# Altium PCB linearInjector.PcbDoc
Units mm, origin at the board's own origin, x right, y up, seen from the top; angles counter-clockwise.
Board outline 105.25 x 56.25 mm, 2 copper layers (Top Layer, Bottom Layer); 33 components, 16 nets, 76 pads, 5 vias.
Unrouted connection lines stored in the file: 59.
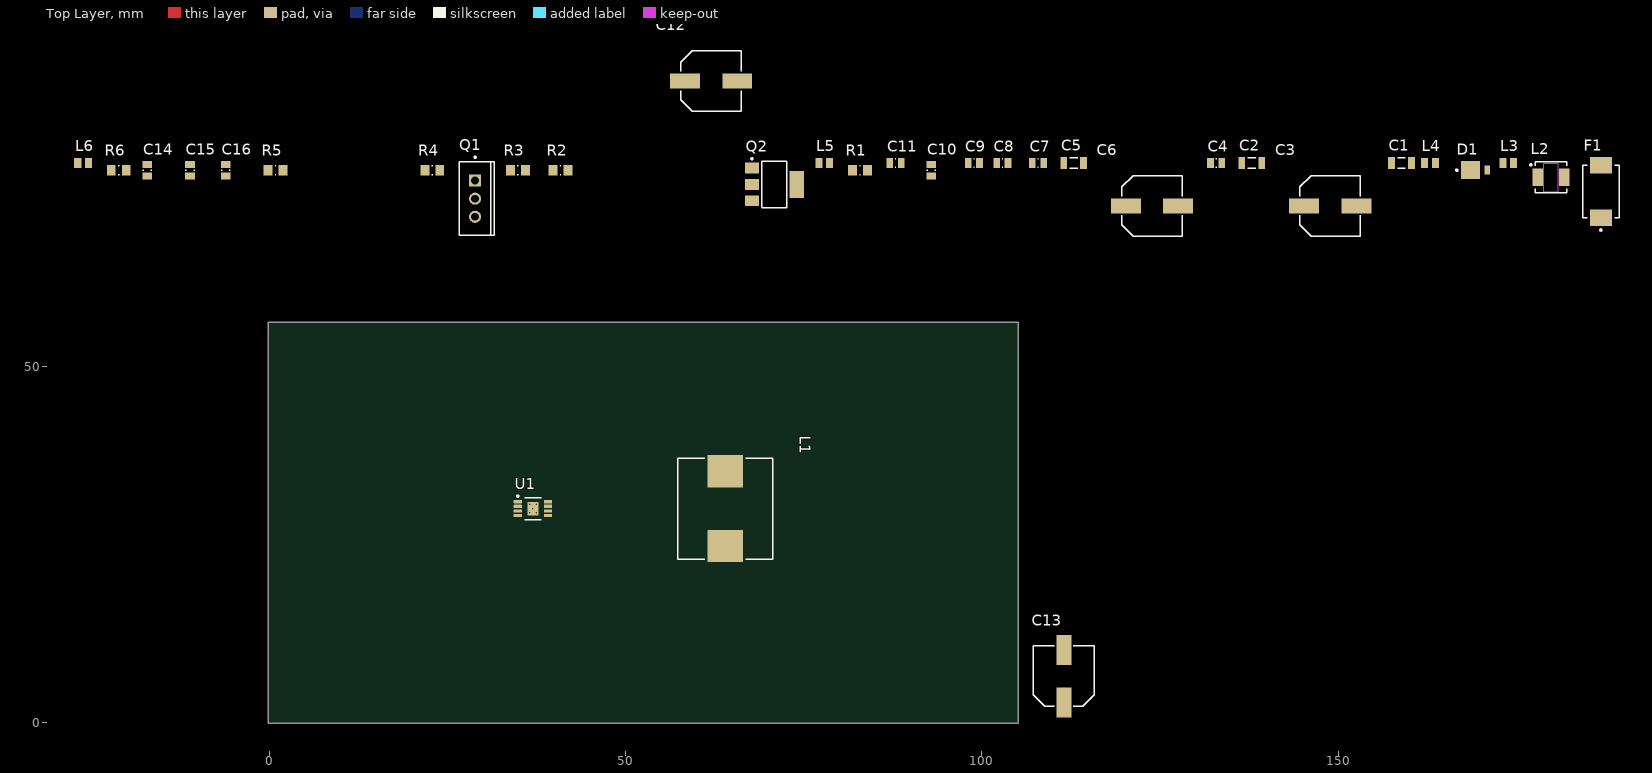
[diagram p0: Top Layer view]
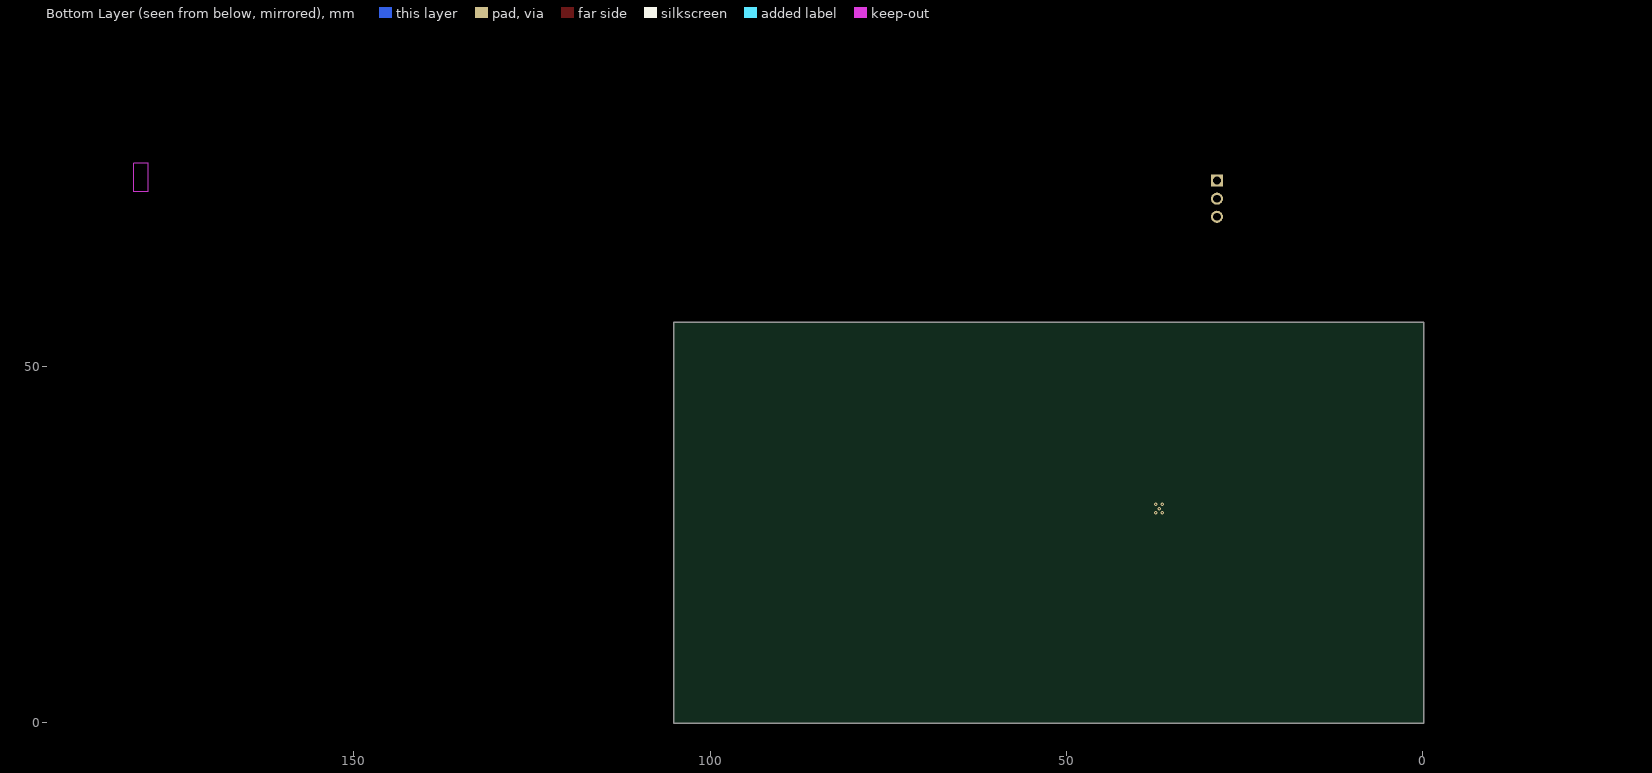
[diagram p1: Bottom Layer view, seen from below]

## Layer stack, top to bottom
Top Solder: solder mask 0.0102, Solder Resist, Dk 3.5
Top Layer: signal copper 0.0356
Dielectric 1: dielectric 0.32, FR-4, Dk 4.8
Bottom Layer: signal copper 0.0356
Bottom Solder: solder mask 0.0102, Solder Resist, Dk 3.5

## Board outline
-0.127,-0.127 105.127,-0.127 105.127,56.127 -0.127,56.127

## Design rules (kind name [scope] priority, off if disabled: settings)
Clearance [All] p1: gap=0.254 ignorepadtopadclearanceinfootprint=FALSE except(0: Arc-Hole Track-Hole SMDPad-Hole THPad-Hole Via-Hole Fill-Hole Poly-Hole Region-Hole Text-Hole)
PolygonConnect [All] p1: connectstyle=Relief reliefconductorwidth=0.254 reliefentries=4 polygonreliefangle="90 Angle" airgapwidth=0.254
RoomDefinition linearInjector_main [InComponentClass('linearInjector_main')] p1: confinementstyle=ConfineIn formatcopy=TRUE lockcomponents=FALSE outline 106.5,2.5 346.5,2.5 346.5,25.5 106.5,25.5
RoutingVias [All] p1: holewidth=0.711 width=1.27 viastyle="Through Hole" minholewidth=0.711 minwidth=1.27 maxholewidth=0.711 maxwidth=1.27
SolderMaskExpansion [All] p1: expansion=0.102
Width [All] p1: maxlimit=0.254 minlimit=0.254 preferedwidth=0.254
30 further rules are at their usual default settings.

## Components (designator, comment, footprint, x,y, rotation, side; value= is the part's Value field where it differs from the comment)
C1 "10uF" CAPC1206(3216)130_L 158.884,78.5 r0 top
C2 "10uF" CAPC1206(3216)130_L 137.884,78.5 r0 top
C3 "EEE-FK1E221P" PNSC-EEE-FK1E221P_N 148.884,72.5 r0 top
C4 "1uF" CAPC0805(2012)75_L 132.884,78.5 r0 top value=10nF
C5 "10uF" CAPC1206(3216)130_L 112.884,78.5 r0 top
C6 "EEE-FK1E221P" PNSC-EEE-FK1E221P_N 123.884,72.5 r0 top
C7 "100nF" CAPC0805(2012)75_L 107.884,78.5 r0 top value=10nF
C8 "1uF" CAPC0805(2012)75_L 102.884,78.5 r0 top value=10nF
C9 "10nF" CAPC0805(2012)75_L 98.884,78.5 r0 top
C10 "100nF" CAPC0805(2012)75_L 92.884,77.5 r90 top value=10nF
C11 "10nF" CAPC0805(2012)75_L 87.884,78.5 r0 top
C12 "EEE-FK1E221P" PNSC-EEE-FK1E221P_N 62,90 r0 top
C13 "EEE-FK1E221P" PNSC-EEE-FK1E221P_N 111.5,6.5 r90 top
C14 "10nF" CAPC0805(2012)75_L -17.116,77.5 r90 top
C15 "100nF" CAPC0805(2012)75_L -11.116,77.5 r90 top value=10nF
C16 "1uF" CAPC0805(2012)75_L -6.116,77.5 r90 top value=10nF
D1 "MBRM120LT3" ONSC-POWERMITE-2-457-04_D_V 169.884,77.5 r0 top
F1 "0ZCF0110FF2C" TECO-SMD100F-2_V 186.884,74.5 r90 top
L1 "7443550101" WE-HCI-1350 64,30 r270 top
L2 "744373240010" "WE-LHMI 4020" 179.884,76.5 r0 top
L3 "0805" INDC2013X105X50LL20T30 173.884,78.5 r0 top
L4 "0805" INDC2013X105X50LL20T30 162.884,78.5 r0 top
L5 "0805" INDC2013X105X50LL20T30 77.884,78.5 r0 top
L6 "0805" INDC2013X105X50LL20T30 -26.116,78.5 r0 top
Q1 "2SB1259" ONSC-TO-220-3-221A-09 28.884,73.5 r0 top
Q2 "BSP19AT1" ONSC-SOT-223-4-318E-04_V 70.884,75.5 r0 top
R1 "1k" RESC0805(2012)_M 82.884,77.5 r0 top value="1780.00 Ohm"
R2 "1k" RESC0805(2012)_M 40.884,77.5 r0 top value="1780.00 Ohm"
R3 "1k" RESC0805(2012)_M 34.884,77.5 r0 top value="1780.00 Ohm"
R4 "100" RESC0805(2012)_M 22.884,77.5 r0 top value="1780.00 Ohm"
R5 "1k" RESC0805(2012)_M 0.884,77.5 r0 top value="1780.00 Ohm"
R6 "1k" RESC0805(2012)_M -21.116,77.5 r0 top value="1780.00 Ohm"
U1 "THS3120IDGN" DGN0008D_L 37,30 r0 top

## Footprints (in the part's own frame and the unit in brackets; to place one, negate y for a bottom-side part, rotate by r counter-clockwise, add the part's x,y. Pads: shape width x height; smd on the part's side, far side on the other; paste and mask are expansions set on the pad)
CAPC0805(2012)75_L [mm] "Chip Capacitor, Body 2.0x1.2mm, Height 0.75mm, IPC High Density"
  rect 0.95x1.35 smd: 1(-0.8,0) 2(0.8,0)
  silkscreen extent -0.05,-0.58 0.05,0.58, body extent -1.1,-0.72 1.1,0.72, height 0.75
CAPC1206(3216)130_L [mm] "Chip Capacitor, Body 3.2x1.6mm, Height 1.3mm, IPC High Density"
  rect 0.95x1.7 smd: 1(-1.4,0) 2(1.4,0)
  silkscreen extent -0.55,-0.75 0.55,0.75, body extent -1.7,-0.9 1.7,0.9, height 1.3
DGN0008D_L [mm] "TSOP, 8-Leads, Body 3.1x3.1mm, Pitch 0.65mm, Thermal Pad 1.89x1.57mm, IPC High Density"
  rrect22% 1.15x0.45 smd: 1(-2.125,0.975) 2(-2.125,0.325) 3(-2.125,-0.325) 4(-2.125,-0.975) 5(2.125,-0.975) 6(2.125,-0.325) 7(2.125,0.325) 8(2.125,0.975)
  rrect6% 1.57x1.89 smd: 9(0,0)
  silkscreen extent -2.25,-1.55 1.15,1.87, body extent -2.45,-1.5 2.45,1.5, height 0.94
INDC2013X105X50LL20T30 [mm] "Chip Inductor, 2-Leads, Body 2.2x1.45mm, IPC High Density"
  rect 0.99x1.39 smd: 1(-0.755,0) 2(0.755,0)
  body extent -1.1,-0.72 1.1,0.72, height 1.05
ONSC-POWERMITE-2-457-04_D_V [mm] "POWERMITE, 2-Leads, Body 1.965x1.9mm"
  rect 2.67x2.54 smd: 1(-1.335,0)
  rect 0.762x1.27 smd: 2(1.016,0)
  silkscreen extent -3.34,-0.12 -3.09,0.12, body extent -2.04,-0.95 -0.08,0.95, height 1.15
ONSC-SOT-223-4-318E-04_V [mm] "SOT223, 4-Leads, Body 6.5x3.5mm, Pitch 2.3mm"
  rect 2x1.5 smd: 1(-3.15,2.3) 2(-3.15,0) 3(-3.15,-2.3)
  rect 2x3.8 smd: 4(3.15,0)
  silkscreen extent -3.27,-3.25 1.75,3.72, body extent -1.75,-3.25 1.75,3.25, height 1.75
ONSC-TO-220-3-221A-09 [mm] "FM, 3-Leads, Body 10.3x4.85mm, Pitch 2.54mm"
  rect 1.7x1.7 hole 1.1: 1(0,2.54)
  round 1.7 hole 1.1: 2(0,0) 3(0,-2.54)
  silkscreen extent -2.2,-5.15 2.7,5.92, body extent -2.18,-5.15 2.67,5.15, height 19.85
PNSC-EEE-FK1E221P_N [mm] "CAPAE, 2-Leads, Dia 8mm, Body Length 10.5mm, IPC Medium Density"
  rect 4.2x2.1 smd: 1(-3.675,0) 2(3.675,0)
  silkscreen extent -4.25,-4.25 4.25,4.25, body extent -5,-4.25 5,4.25, height 10.5
RESC0805(2012)_M [mm] "Chip Resistor, Body 2.0x1.3mm, IPC Low Density"
  rect 1.25x1.5 smd: 1(-1.05,0) 2(1.05,0)
  silkscreen extent -0.05,-0.65 0.05,0.65, body extent -1.1,-0.67 1.1,0.67, height 0.7
TECO-SMD100F-2_V [mm] "SMD, 2-Leads, Body 7.34x5.12mm"
  rect 2.3x3.1 smd: 1(-3.7,0) 2(3.7,0)
  silkscreen extent -5.52,-2.56 3.68,2.56, body extent -3.67,-2.56 3.67,2.56, height 3
WE-HCI-1350 [mm] "Inductor, 2-Leads, Body 13.0 x 12.8 mm"
  rect 4.5x5 smd: 1(-5.25,0) 2(5.25,0)
  silkscreen extent -7.1,-6.65 7.1,6.65, body extent -7,-6.4 7,6.4, height 4.99
"WE-LHMI 4020" [mm] "SMD Inductor, 2-Leads, Body 4.45 x 4.06mm"
  rect 1.5x2.4 smd: 1(-1.85,0) 2(1.85,0)
  Keep-Out Layer lines w0.127: -1,-2 -1,2 1,2 1,-2 -1,-2
  silkscreen extent -2.97,-2.2 2.2,2.2, body extent -2.22,-2.03 2.23,2.03, height 1.8

## Part data
C1 C2 C5: library part CMP-1037-04970-1, Case-EIA=1206, Case-Metric=3216, Rated Voltage="10 V", Tolerance="-20% to +80%", Max Thickness="1.3 mm", Technology=SMT
C3 C6 C12 C13: library part CMP-1665-00017-1, "CAP ALUM 220UF 20% 25V SMD", Datasheet=http://industrial.panasonic.com/cdbs/www-data/pdf/RDE0000/ABA0000C1181.pdf, PartNumber=EEE-FK1E221P
C4 C7 C8 C9 C10 C11 C14 C15 C16: library part CMP-1036-03812-1, Case-EIA=0805, Case-Metric=2012, Rated Voltage="10 V", Tolerance="-20% to +80%", Max Thickness="0.75 mm", Technology=SMT
D1: library part CMP-1055-00282-1, "Schottky Power Rectifier, 2-Pin Powermite, Tape and Reel", Manufacturer="On Semiconductor", ComponentLink1Description="Manufacturer URL", ComponentLink1URL=http://www.onsemi.com/, ComponentLink2Description=Datasheet, ComponentLink2URL=http://www.onsemi.cn/pub_link/Collateral/MBRM120L-D.PDF, ComponentLink3Description="Package Specification", ComponentLink3URL=http://www.onsemi.com/pub_link/Collateral/457-04.PDF, Configuration=Single, DatasheetVersion="Rev. 7", IFSM Max (A)=50, Mounting Technology="Surface Mount", Note1=0, PackageDescription="2-Pin POWERMITE, Body 1.965 x 1.9 mm", PackageReference=POWERMITE-2-457-04, PackageVersion="Rev. F, 05/2013", Packing="Tape and Reel", PartNumber=MBRM120LT3, RoHS=FALSE
F1: library part CMP-2000-05420-1, "ptc", Hold Current=1.1A, Manufacturer=TEConnectivity/CircuitProtection, Maximum Current Rating=40A, Maximum Initial Resistance=N/A, Maximum Post Trip Resistance=0.48Ohm, Maximum Voltage Rating=30V, Minimum Initial Resistance=0.12Ohm, Operating Temperature=85(Max)C, Package/Case=2920, Package Description="2-Pin Surface Mount Device, Body 7.34 x 5.12 mm", Package Reference=SMD100F-2, Trip Current=2.2A, Typical Power Dissipation=1.7(Max)W, Agency Approvals=CSA/TUV/UL, Applications=N/A, Datasheet URL=http://datasheet.octopart.com/SMD100F-2-Tyco-Electronics-datasheet-11085073.pdf, Datasheet Version=May-11, Dimension=N/A, Family=SMD, Lead Diameter=N/R, Manufacturer URL=http://www.te.com/, Maximum Trip Time=N/A, Mounting=SurfaceMount, Number of Terminals=2, Packaging=TapeandReel, Part No=SMD100F-2, RoHS=Yes, Seated Plane Height=N/R, Terminal Pitch=N/A, Wire Form=N/R
L1: library part CMP-0226-00031-1, "SMD Flat Wire High Current Inductor WE-HCI, L=10.0 µH", Inductance="10.0 µH", ComponentLink1Description="Manufacturer Link", ComponentLink1URL=http://www.we-online.com, ComponentLink2Description=Datasheet, ComponentLink2URL=http://www.we-online.de/katalog/media/pdf/7443550101.pdf, DatasheetVersion="ver 1, Aug-2009", PackageDescription="Inductor, 2-Leads, Body 13.0 x 12.8 mm", PackageReference=WE-HCI-1350, PackageVersion=2008
L2: library part CMP-1353-00038-1, "SMD Power Inductor WE-LHMI, L=0.10 µH", Inductance="0.10 µH", Manufacturer="Wuerth Elektronik", ComponentLink1Description="Manufacturer URL", ComponentLink1URL=http://www.we-online.com, ComponentLink2Description=Datasheet, ComponentLink2URL=http://katalog.we-online.de/kataloge/eisos/media/pdf/744373240010.pdf, PackageReference="WE-LHMI 4020", PartNumber=744373240010
L3 L4 L5 L6: library part CMP-1660-00003-1, Case Code (Metric)=2012, Current Rating="6 A", Max Operating Temperature="125 degC", Min Operating Temperature="-40 degC", Package Quantity=1, Resistance="4 mohm", Tolerance=30%, Case\Package=0805, Case Code (Imperial)=0805, ComponentLink1Description="Manufacturer URL", ComponentLink1URL=http://www.t-yuden.com/, ComponentLink2Description=Datasheet, ComponentLink2URL=http://ds.yuden.co.jp/TYCOMPAS/ut/detail.do?productNo=FBMJ2125HM210NT&fileName=FBMJ2125HM210NT_SS&mode=specSheetDownload, Core Material=Ferrite, DatasheetVersion=08/2016, Height="0.85 mm", Impedance="21 Ohm", Length="2 mm", Max Current Rating="6 A", Mount="Surface Mount", Mounting Technology="Surface Mount", PackageDescription="2-Pin Surface Mount Device, Body 2 x 1.25 mm", PackageReference=0805, Packaging="Tape and Reel", REACH SVHC=Unknown, RoHSCompliant=true, Width="1.25 mm"
Q1: library part CMP-1031-00034-1, Manufacturer="On Semiconductor", PartNumber=MJE5740G, ComponentLink1Description="Manufacturer URL", ComponentLink1URL=http://www.onsemi.com/, ComponentLink2Description=Datasheet, ComponentLink2URL=http://www.onsemi.com/pub_link/Collateral/MJE5740-D.PDF, ComponentLink3Description="Package Specification", ComponentLink3URL=http://www.onsemi.com/pub_link/Collateral/221A-09.PDF, DatasheetVersion="Rev. 11", IC Continuous (A)=8, Mounting Technology="Through Hole", PackageDescription="3-Pin Flange Mount, Vertical Straight Lead, Body 9.97 x 4.445 mm, Pitch 2.54 mm", PackageReference=TO-220-3-221A-09, PackageVersion="Rev. AG, 09/2011", Packing=Tube, Polarity=NPN, RoHS=TRUE
Q2: library part CMP-1048-00457-1, "NPN Silicon Expitaxial Transistor, 4-Pin SOT-223, Tape and Reel", Manufacturer="On Semiconductor", ComponentLink1Description="Manufacturer URL", ComponentLink1URL=http://www.onsemi.com/, ComponentLink2Description=Datasheet, ComponentLink2URL=http://www.onsemi.com/pub_link/Collateral/BSP19AT1-D.PDF, ComponentLink3Description="Package Specification", ComponentLink3URL=http://www.onsemi.com/pub_link/Collateral/318E-04.PDF, DatasheetVersion="Rev. 11", fT Min (MHz)=70, IC Continuous (A)=0.1, Mounting Technology="Surface Mount", PackageDescription="4-Pin Small Outline Transistor, Body 6.5 x 3.5 mm, Pitch 2.3 mm", PackageReference=SOT-223-4-318E-04, PackageVersion="Rev. N, 08/2009", Packing="Tape and Reel", PartNumber=BSP19AT1, Polarity=NPN, RoHS=FALSE
R1 R2 R3 R5 R6: library part CMP-1013-00536-1, "1k 1%", Case-EIA=0805, Case-Metric=2012, Power="0.125 W", Tolerance="1 %", Technology=SMT
R4: library part CMP-1013-00536-1, Case-EIA=0805, Case-Metric=2012, Power="0.125 W", Tolerance="1 %", Technology=SMT
U1: library part CMP-0018-00648-2, "Single, Low Noise, High Output Drive, 475 mA Current-Feedback Amplifier with Power-Down, 10 to 30 V, -40 to 85 degC, 8-pin SOP (DGN8), Green (RoHS & no Sb/Br)", Manufacturer="Texas Instruments", 2nd Harmonic(dBc)=51, 3rd Harmonic(dBc)=50, @ MHz=10, Acl, min stable gain(V/V)=1, BW @ Acl(MHz)=130, Code_JEDEC=MO-187, ComponentLink1Description="Manufacturer URL", ComponentLink1URL=http://www.ti.com/, ComponentLink2Description=Datasheet, ComponentLink2URL=http://www.ti.com/general/docs/lit/getliterature.tsp?genericPartNumber=THS3120&fileType=pdf, ComponentLink3Description="Package Specification", ComponentLink3URL=http://www.ti.com/litv/pdf/mpds046e, DatasheetVersion=SLOS420E, Diff Gain(%)=0.007, Diff Phase(deg)=0.018, Eco-Plan="Green (RoHS & no Sb/Br)", Iib(Max)(nA)=20000, Io(Typ)(mA)=475, Iq per channel(Max)(mA)=11, Mounting Technology="Surface Mount", Number of Channels=1, PackageDescription="8-pin Plastic Small Outline, Body 3 x 3 mm, Pitch 0.65 mm", PackageReference=DGN0008D, PackageVersion="4073271/F, 05/2011", PartNumber=THS3120IDGN, Settling Time (0.1%)(Typ)(ns)=11, Slew Rate(Typ)(V/us)=1700, Sub Family="High Output Current Amplifier (>=50mA), High Speed Amplifier (>=50MHz), High Supply Voltage Amplifier (>=30V)", THD (Fc is 1 MHz)(Typ)(dB)=-78, Vio(Max)(mV)=8, Vn at Flatband(Typ)(nV/rtHz)=2.5, Vs(Max)(V)=30, Vs(Min)(V)=10

## Via types
v1: diameter 0.5, hole 0.2, Top Layer to Bottom Layer, 5 vias

## Nets (pads, with @x,y where several pads share a name; then routed paths per layer and width w, separated by ;. In a path a pad name is that pad's centre, name@x,y a point inside that pad or via, vN(x,y) a via of type N, cw(c..) or ccw(c..) an arc to the next point about the centre after c; other vN are vias at no path point)
AC_Input: C12.1 C13.1
GND: C1.2 C2.2 C3.2 C4.1 C5.2 C6.2 C7.1 C8.1 C9.1 C10.1 C11.1 C14.1 C15.1 C16.1 D1.2 R6.1 U1.1 U1.4 U1.8 U1.9
  other v1: 36.55,29.4 37.45,29.4 37,30 36.55,30.6 37.45,30.6
NetC1_1: C1.1 C4.2 C7.2 C9.2 L3.1 U1.7
NetC2_1: C2.1 C3.1 C5.1 C6.1 C8.2 C10.2 C11.2 L4.1 Q1.1 Q1.2 Q2.1 Q2.2 Q2.4 U1.6
NetC12_2: C12.2 C13.2 R2.1
NetC14_2: C14.2 C15.2 C16.2 R3.1 R5.1 R6.2
NetD1_1: D1.1 F1.1 L3.2
NetL1_1: L1.1 L2.2
NetL2_1: L2.1 L4.2
NetL5_1: L5.1 R3.2
NetL6_1: L6.1 R1.2
NetR1_1: R1.1 R2.2 R4.2 U1.2
NetR4_1: R4.1 R5.2 U1.3
Opamp_Supply: F1.2
Power_Input: L1.2
Power_Output: L5.2 L6.2 Q1.3 Q2.3
pads on no net: U1.5

## Silkscreen, mask and mechanical layers (free items; w line width, h text height)
Mechanical 3:
  lines w0.254: 7.496,0 51.496,0 ccw(c51.496,1) 52.496,1 ; 7.5,0 ccw(c0,0) 0,7.5 0,18 cw(c1,18) 1,19 10,19 ccw(c10,20) 11,20 11,29 11,37.73 ccw(c9.73,37.73) 9.73,39 1,39 cw(c1,40) 0,40 0,48.75 ccw(c0,56.25) 7.496,56 51.496,56 cw(c51.496,55) 52.496,55 ; 52.5,1 52.5,6 52.5,9.726 ccw(c52.496,9.726) 52.496,9.73 cw(c53.766,9.73) 53.766,11 91,11 cw(c91,10) 92,10 92,1 ; 52.5,55 52.5,50 52.5,46.274 cw(c52.496,46.274) 52.496,46.27 ccw(c53.766,46.27) 53.766,45 91,45 ccw(c91,46) 92,46 92,55 cw(c93,55) 93,56 97.495,56 ; 92,1 ccw(c93,1) 93,0 97.495,0 cw(c104.996,0) 104.996,7.5 104.996,48.492 cw(c105,48.492) 105,48.496 cw(c105,55.996) 97.5,55.996 ccw(c97.496,55.996) 97.496,56 ; 97.495,56 ccw(c97.496,56) 97.496,56 ; 97.496,56 97.496,56